# Altium PCB PowerDimmer5.PcbDoc
Units mil, origin at the board's own origin, x right, y up, seen from the top; angles counter-clockwise.
Board outline 6000 x 4000 mil, 2 copper layers (Top Layer, Bottom Layer); 35 components, 26 nets, 100 pads, 0 vias.
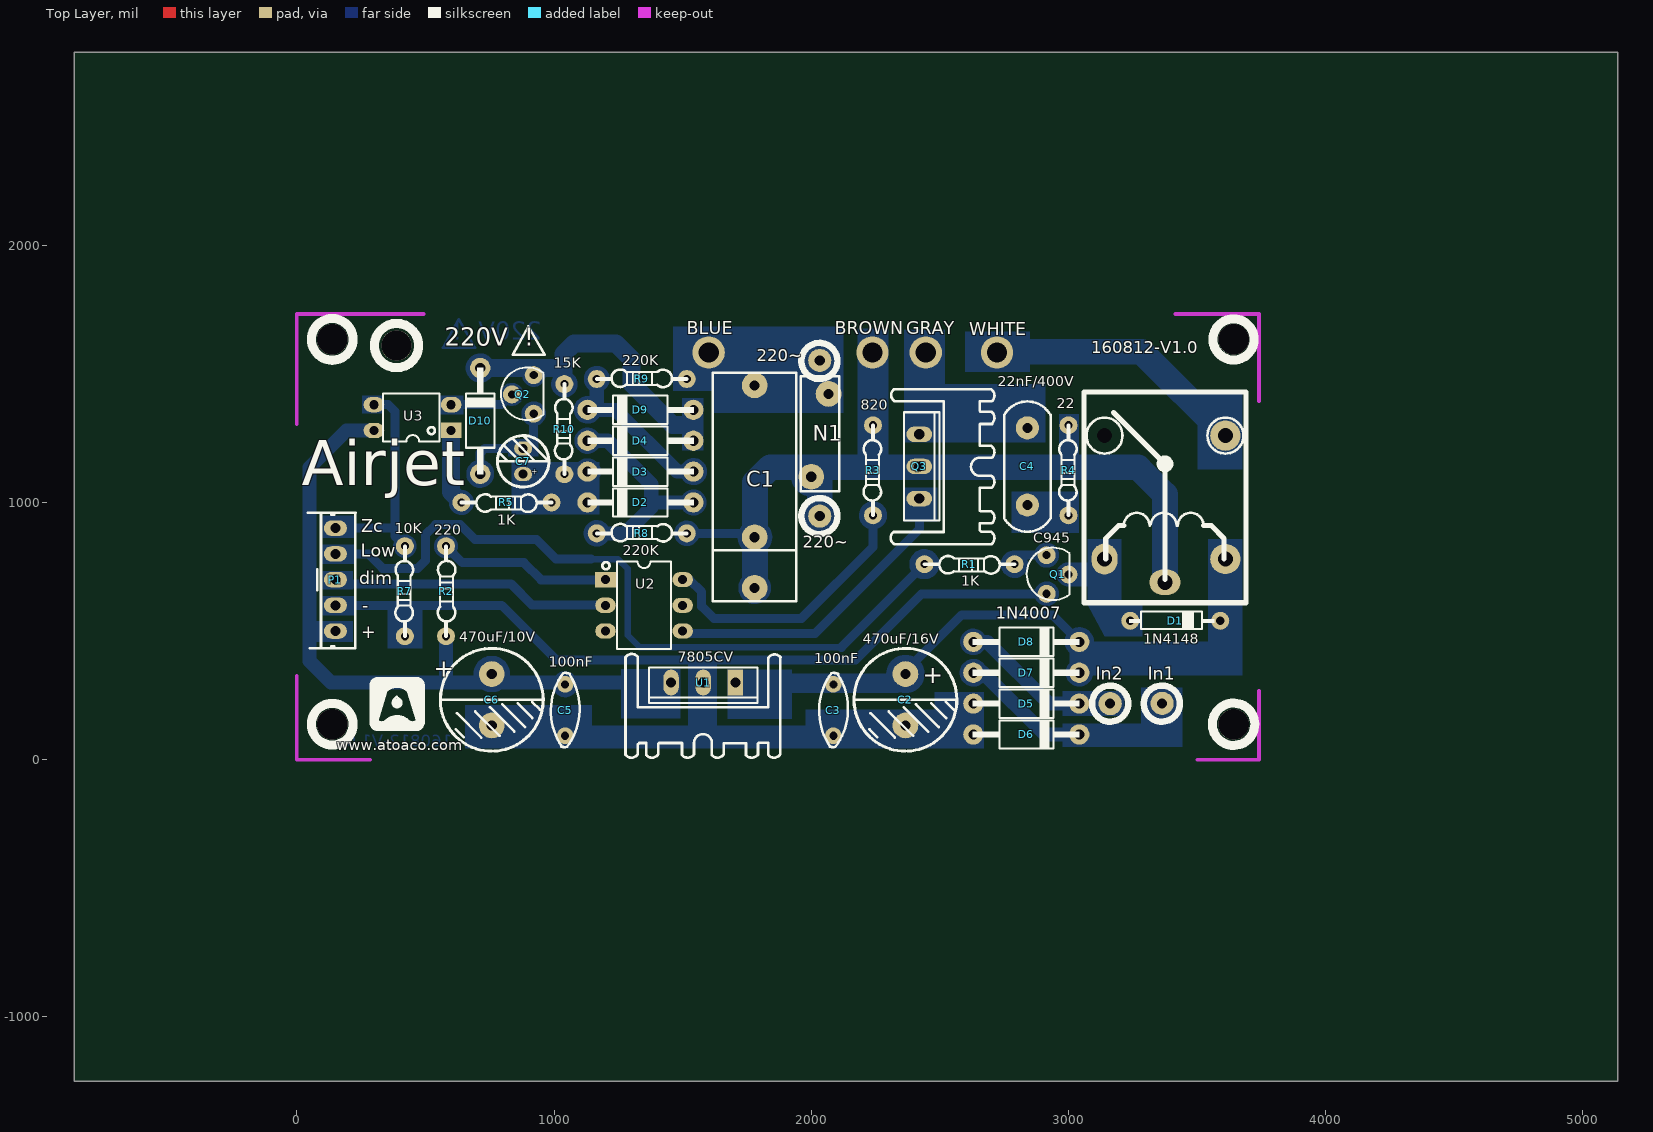
[diagram p0: Top Layer view]
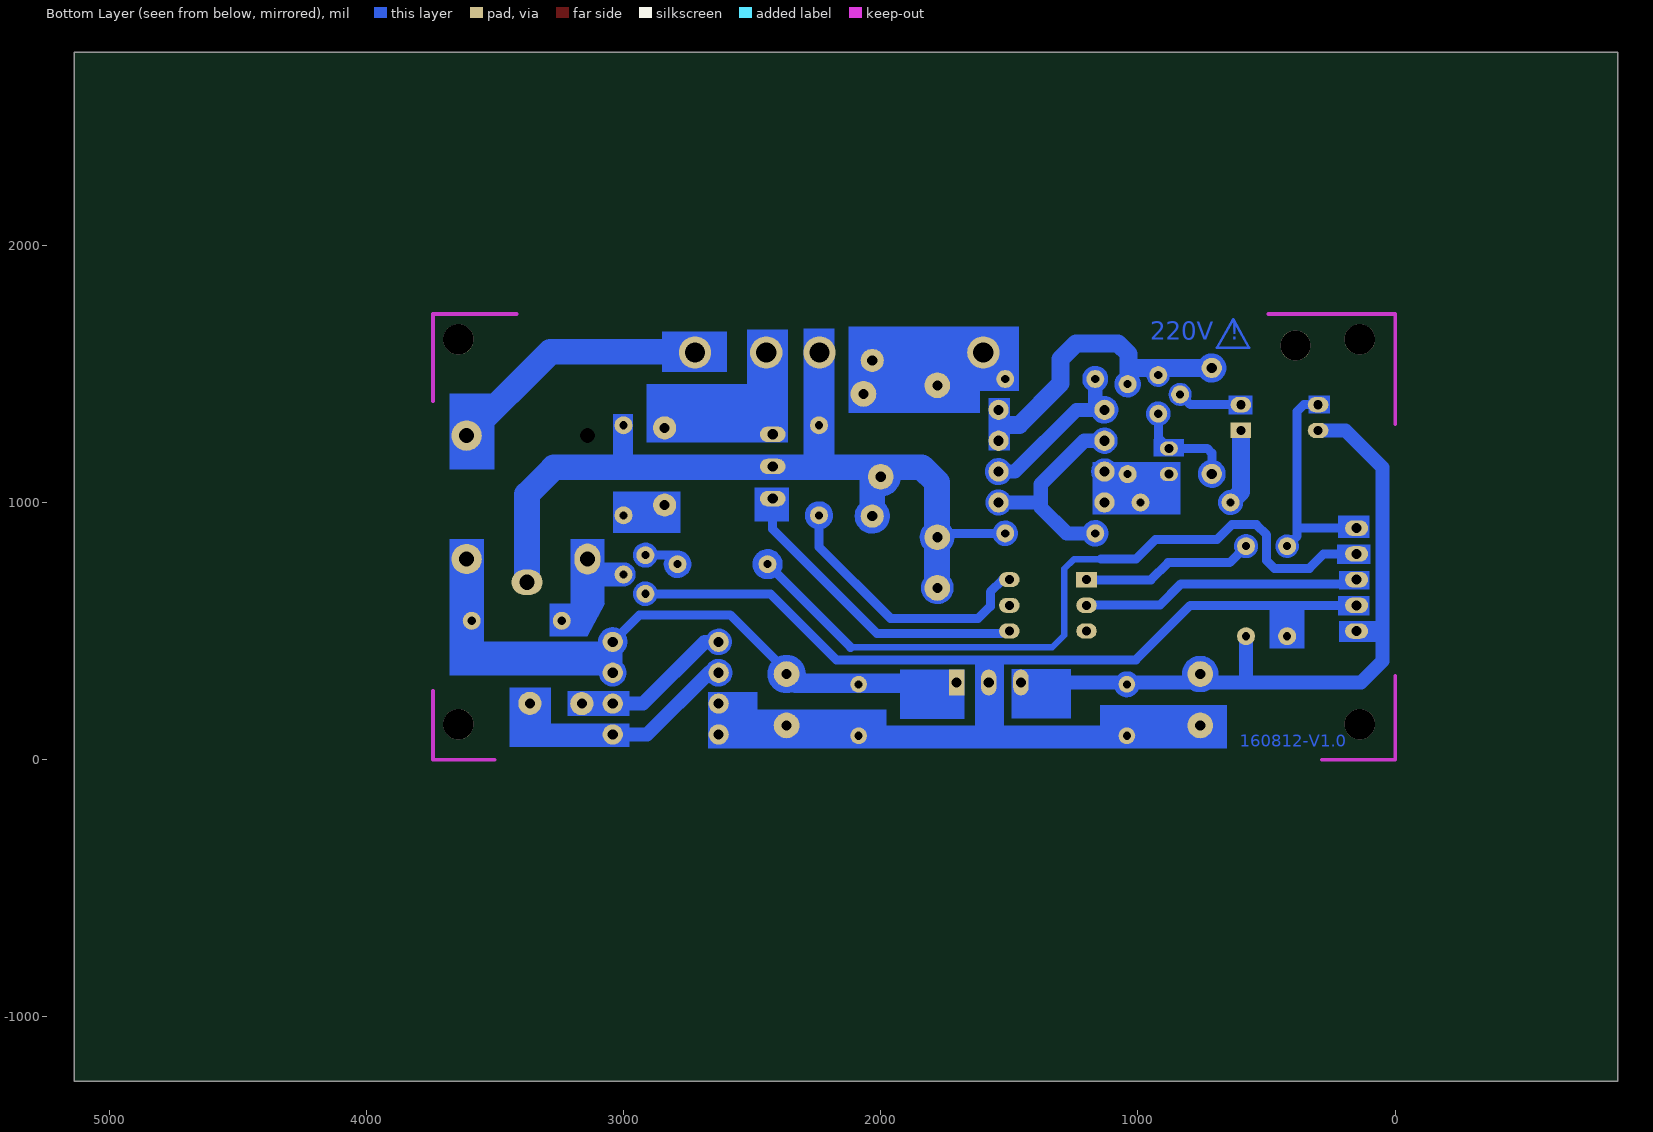
[diagram p1: Bottom Layer view, seen from below]

## Layer stack, top to bottom
Top Layer: signal copper 1.4
Dielectric: dielectric 12.6, FR-4, Dk 4.8
Bottom Layer: signal copper 1.4

## Board outline
-865,-1250 5135,-1250 5135,2750 -865,2750

## Design rules (kind name [scope] priority, off if disabled: settings)
Clearance [All] p1: gap=10
PolygonConnect [All] p1: connectstyle=Relief reliefconductorwidth=10 reliefentries=4 polygonreliefangle="90 Angle"
RoutingVias [All] p1: holewidth=28 width=50 viastyle="Through Hole" minholewidth=28 minwidth=50 maxholewidth=28 maxwidth=50
SolderMaskExpansion [All] p1: expansion=4
TestPointUsage [All] p1: valid=0 allowmultiple=FALSE
Testpoint [All] p1: side=15 testpointundercomponent=TRUE minsize=40 maxsize=100 preferedsize=60 minholesize=0 maxholesize=40 preferedholesize=32 testpointgrid=1 style=1023 order=0-112345678
Width [All] p1: maxlimit=200 minlimit=10 preferedwidth=10 toplayer_maxwidth=10 bottomlayer_prefwidth=35 minimp=50.000000 maximp=50.000000 favimp=50.000000
19 further rules are at their usual default settings.

## Components (designator, comment, footprint, x,y, rotation, side; value= is the part's Value field where it differs from the comment)
C1 "220nF/300V" Cap15-20 1780,1160 r270 top
C2 "470uF/16V" RB.2/.4 2366,333 r270 top
C3 "100nF" RAD0.2 2086,93 r90 top
C4 "22nF/400V" Cap10 2840,1140 r270 top
C5 "100nF" RAD0.2 1043,93 r90 top
C6 "470uF/10V" RB.2/.4 758,333 r270 top (schematic designator C2)
C7 "10uF/50V" RB.1/.2 880,1160 r90 top
D1 "1N4148" DIODE0.35 3240,540 r0 top (schematic designator D8)
D2 "1N4007" DIODE0.4 1336,1000 r180 top
D3 "1N4007" DIODE0.4 1336,1120 r180 top
D4 "1N4007" DIODE0.4 1336,1240 r180 top
D5 "1N4007" DIODE0.4 2836,218 r0 top (schematic designator D1)
D6 "1N4007" DIODE0.4 2836,98 r0 top (schematic designator D2)
D7 "1N4007" DIODE0.4 2836,338 r0 top (schematic designator D3)
D8 "1N4007" DIODE0.4 2836,458 r0 top (schematic designator D4)
D9 "1N4007" DIODE0.4 1336,1360 r180 top
D10 "1N4007" DIODE0.4 713,1317 r90 top
N1 "10D471K" VARISTOR-10MIL 2000,1100 r90 top
P1 "xH5" CON5 150,500 r0 top
Q1 "C945" TO92BS1 2940,720 r270 top
Q2 "7805CV" TO92BS2 896,1420 r270 top
Q3 "Triac" TO-220HS28#1 2420,1140 r270 top
R1 "1K" RES0.35 2440,760 r0 top (schematic designator R9)
R2 "220" RES0.35 580,480 r90 top
R3 "820" RES0.35 2240,1300 r270 top
R4 "22" RES0.35 3000,1300 r270 top
R5 "1K" RES0.35 640,1000 r0 top
R7 "10K" RES0.35 420,830 r270 top
R8 "220K" RES0.35 1516,880 r180 top
R9 "220K" RES0.35 1516,1480 r180 top
R10 "15K" RES0.35 1040,1460 r270 top
U1 "7805CV" TO-220HS28#2 1580,300 r180 top (schematic designator Q2)
U2 "MOC3021" DIP6 1200,700 r270 top
U3 "PC817" DIP4-OPTO 600,1280 r90 top
WHITE "Relay 12V/10A" RELAY2 3140,780 r90 top (schematic designator K4)

## Footprints (in the part's own frame and the unit in brackets; to place one, negate y for a bottom-side part, rotate by r counter-clockwise, add the part's x,y. Pads: shape width x height; smd on the part's side, far side on the other; paste and mask are expansions set on the pad)
Cap10 [mil]
  round 90 hole 39.37: 1(-150,0) 2(150,0)
  silkscreen extent -253,-91 254,91
Cap15-20 [mm]
  round 2.54 hole 1: 1(7.5,0) 1(12.5,0) 2(-7.5,0)
  silkscreen extent -8.76,-4.14 13.82,4.11
CON5 [mil] "100mil between pins"
  oval 90x60 hole 39.37: 1(0,0) 2(0,100) 3(0,200) 4(0,300) 5(0,400)
  silkscreen extent -108,-67 79,461
DIODE0.4 [mm] "Diode, Axial; Body 5.2 x 2.7 mm (LxDia. max), Lead Dia. 0.86 mm (max)"
  round 2 hole 1: 1(-5.23,0) 2(5.23,0)
  silkscreen extent -5.3,-1.4 5.25,1.4
DIODE0.35 [mil] "Diode 1N4148"
  round 70 hole 31.5: 1(0,0) 2(350,0)
  silkscreen extent -4,-31 327,35
DIP4-OPTO [mil] "DIP; 4 Leads; Row Spacing 7.62 mm; Pitch 2.54 mm"
  rect 60x80 hole 35.43: 1(0,0)
  oval 60x80 hole 35.43: 2(100,0)
  oval 59.05x80 hole 35.43: 3(100,300) 4(0,300)
  silkscreen extent -43,46 143,265
DIP6 [mm] "DIP; 6 Leads; Row Spacing 7.62 mm; Pitch 2.54 mm"
  rect 1.524x2.032 hole 0.9: 1(0,0)
  oval 1.524x2.032 hole 0.9: 2(2.54,0)
  oval 1.5x2.032 hole 0.9: 3(5.08,0) 4(5.08,7.62) 5(2.54,7.62) 6(0,7.62)
  silkscreen extent -1.78,-0.3 6.86,6.46
RAD0.2 [mil]
  round 65 hole 31.5: 1(0,0) 2(200,0)
  silkscreen extent -44,-57 244,55
RB.1/.2 [mil]
  oval 55x70 hole 35.43: 1(-50,0) 2(50,0)
  silkscreen extent -100,-100 100,100
RB.2/.4 [mm]
  round 2.54 hole 1: 1(0,0) 2(5.08,0)
  silkscreen extent -2.54,-5.08 7.62,5.08
RELAY2 [mm]
  oval 3.048x2.54 hole 1.5: 1(0,0)
  round 3 hole 1.5: 2(0,-11.938) 4(12.192,-11.938)
  oval 2.54x3.048 hole 1.5: 3(-2.286,-5.969)
  round 1.3 hole 1.5: 5(12.192,0)
  silkscreen extent -4.32,-13.97 16.51,2.03
RES0.35 [mil] "Diode, Axial; Body 5.2 x 2.7 mm (LxDia. max), Lead Dia. 0.86 mm (max)"
  round 70 hole 31.5: 1(0,0)
  round 70 hole 31.5 paste+0: 2(350,0)
  silkscreen extent 0,-37 350,32
TO92BS1 [mil] "NPN-2N3904"
  round 70 hole 31.5: 1(-75,-25) 2(0,60) 3(75,-25)
  silkscreen extent -105,-102 100,63
TO92BS2 [mil] "NPN-CC5551,C945 Base Side"
  round 70 hole 31.5: 1(-75,25) 2(0,-60) 3(75,25)
  silkscreen extent -105,-102 100,63
TO-220HS28#1 [mil] "MOSFET-IRF4905- Z46n"
  oval 60x100 hole 39.37: 1(-125,0) 2(0,0) 3(125,0)
  silkscreen extent -300,-111 302,292
TO-220HS28#2 [mil] "MOSFET-IRF4905- Z46n"
  rect 60x100 hole 39.37: 1(-125,0)
  oval 60x100 hole 39.37: 2(0,0) 3(125,0)
  silkscreen extent -300,-111 302,292
VARISTOR-10MIL [mil]
  round 100 hole 39.37: 1(0,0) 2(322,-67)
  silkscreen extent -56,-109 390,41

## Part data
C1: library part CAP, "Capacitor"
C2 C6: library part "Cap Pol1", "Polarized Capacitor (SMD)"
C4: library part Cap, "Capacitor"
C7: library part "Cap Pol", "Polarized Capacitor"
D1 D5 D6 D7 D8: library part Diode, "1 Amp General Purpose Rectifier"
D2 D3 D4 D9 D10: library part Diode
N1: library part "Res Varistor", "Varistor (Voltage-Sensitive Resistor)"
P1: library part "Header 5", "Header, 5-Pin"
Q1 Q2 U1: library part BC337, "NPN General Purpose Amplifier"
Q3: "Silicon Bidirectional Triode Thyristor"
R1 R2 R3 R4 R5 R7 R8 R9 R10: library part Resistor, "Resistor"
U2: library part "Opto TRIAC_1", "Opto-Triac"
U3: library part Optoisolator1, "4-Pin Phototransistor Optocoupler"
WHITE: library part Relay-SPDT, "Single-Pole Dual-Throw Relay"

## Free pads (board coordinates)
  round 118.11 hole 118.11: 6(3641.73,1633.86) 7(137.8,137.8) 7(137.8,1633.86) 7(387.8,1610) 8(3641.73,137.8)
  round 125.98 hole 78.74: 13(1601,1583) 13(2238,1583) 13(2445,1583) 13(2722,1583)
  round 90 hole 39.37: 14(2033,947) 14(2033,1552) 14(3162,218) 14(3364,219)

## Nets (pads, with @x,y where several pads share a name; then routed paths per layer and width w, separated by ;. In a path a pad name is that pad's centre, name@x,y a point inside that pad or via, vN(x,y) a via of type N, cw(c..) or ccw(c..) an arc to the next point about the centre after c; other vN are vias at no path point)
220V: C1.1 N1.1 pad.13@2238,1583 pad.14@2033,947 Q3.2 R3.1 R4.1 R8.1 WHITE.3 | length 4456.2
  Bottom Layer w35: R8.1 C1.1@1763,880 ; C1.1@1764,900 C1.1@1769,905 ; 3000,1167 R4.1 ; R8.1@1548.02,880 ccw(c1516,880) R8.1@1548.02,880 ; C1.1@1825.83,667.87 ccw(c1780,667.87) C1.1@1825.83,667.87 ; 1831,865 ccw(c1781,865) 1831,865 ; 2060.13,1100 ccw(c2000,1100) 2060.13,1100 ; 2084,947 ccw(c2033,947) 2084,947
  Bottom Layer w100: C1.1@1781,667.87 1781,1078 1840,1137 3270,1137 ; pad.14@2033,947 N1.1@2033,1110 ; 3276,1130 3375,1031 WHITE.3
+5V: C5.2 C6.1 P1.1 R2.1 U1.3 U3.4 | length 3558.6
  Bottom Layer w35: 66,502 68,500 ; P1.1@148,502 P1.1 ; C6.1@774,307 C5.2@1029,307 ; 811.34,333 ccw(c758,333) 811.34,333 ; 1076,293 ccw(c1043,293) 1076,293
  Bottom Layer w55: 66,502 P1.1@148,502 ; U3.4 193,1280 49,1136 49,384 133,300 U1.3 ; 580,310 R2.1
+VREL: C2.1 C3.2 D1.2 D7.2 D8.2 U1.1 WHITE.2 | length 2387
  Bottom Layer w35: C2.1 2366,344 2585,563 2936.91,563 D8.2 ; 2423.08,333 ccw(c2366,333) 2423.08,333 ; D7.2@3077.91,338 ccw(c3041.91,338) D7.2@3077.91,338 ; 3081.55,458 ccw(c3041.91,458) 3081.55,458
  Bottom Layer w75: U1.1@1718,297 2330,297 ; D7.2 D8.2
DIMOUT: P1.3 U2.2 | length 1101
  Bottom Layer w35: P1.3 P1.3@167,683 ; P1.3@157,683 833,683 915,601 U2.2@1200,601
GND: C2.2 C3.1 C5.1 C6.2 D5.1 D6.1 P1.2 Q1.3 R7.2 U1.2 | length 5903.3
  Bottom Layer w35: P1.2@140,600 420,600 ; R7.2@420,490 420,600 ; C6.2@774,107 C5.1@1029,107 ; C5.1 1411,93 ; 1423,105 1411,93 ; 1577,104 1580,107 1580,366 ; 1694,93 C3.1 ; D5.1 2630.09,100.09 2623,93 C3.1 ; Q1.3 2429,645 2172,388 1008,388 796,600 420,600 ; 1411,93 C3.1 ; Q1.3@2945.07,645 ccw(c2915,645) Q1.3@2945.07,645
IN1: D6.2 D7.1 pad.14@3364,219 | length 737.7
  Bottom Layer w35: D7.1@2666.14,338 ccw(c2630.09,338) D7.1@2666.14,338
  Bottom Layer w55: D7.1 2668,338 2908,98 D6.2
IN2: D5.2 D8.1 pad.14@3162,218 | length 724.9
  Bottom Layer w35: D8.1@2664.11,458 ccw(c2630.09,458) D8.1@2664.11,458
  Bottom Layer w55: D8.1 2684,458 2924,218 D5.2
MOTOR1: pad.13@2722,1583 WHITE.4 | length 970
  Bottom Layer w100: pad.13@2775,1586 3284,1586 WHITE.4
MOTOR2: C4.1 pad.13@2445,1583 Q3.1
NetC4_2: C4.2 R4.2
NetC7_1: C7.1 D2.2 D3.2 R5.2 R10.2 | length 213.7
  Bottom Layer w35: D3.2@1164.11,1120 ccw(c1130.09,1120) D3.2@1164.11,1120
NetC7_2: C7.2 D10.1 Q2.3 | length 828.2
  Bottom Layer w35: D10.1 713,1192.09 730.91,1210 C7.2 921,1251 Q2.3 ; D10.1@749.91,1111.09 ccw(c713,1111.09) D10.1@749.91,1111.09 ; Q2.3@951.07,1345 ccw(c921,1345) Q2.3@951.07,1345
NetD1_1: D1.1 Q1.2 WHITE.1 | length 542.2
  Bottom Layer w35: Q1.2 3133,720 3140,713 3140,640 D1.1 ; Q1.2@3029.43,720 ccw(c3000,720) Q1.2@3029.43,720
NetD2_1: D2.1 D4.2 R8.2 | length 1604.2
  Bottom Layer w35: D4.2@1163.65,1240 ccw(c1130.09,1240) D4.2@1163.65,1240 ; R8.2@1199.84,880 ccw(c1166,880) R8.2@1199.84,880 ; D2.1@1568.91,1000 ccw(c1541.91,1000) D2.1@1568.91,1000 ; D2.1@1574.92,1000 ccw(c1541.91,1000) D2.1@1574.92,1000
  Bottom Layer w55: D4.2 1209,1240 1378,1071 1378,981 1277,880 R8.2 ; 1400,1000 D2.1
NetD3_1: D3.1 D9.2 R9.2 | length 1274.9
  Bottom Layer w35: D9.2@1166.21,1360 ccw(c1130.09,1360) D9.2@1166.21,1360 ; R9.2@1199.06,1480 ccw(c1166,1480) R9.2@1199.06,1480 ; D3.1@1576.92,1120 ccw(c1541.91,1120) D3.1@1576.92,1120
  Bottom Layer w55: D9.2 1239,1360 1479,1120 D3.1 ; D9.2@1166,1371 R9.2
NetD4_1: D4.1 D9.1 D10.2 Q2.1 R10.1 | length 1830.6
  Bottom Layer w35: D10.2@752.14,1522.91 ccw(c713,1522.91) D10.2@752.14,1522.91 ; Q2.1@948.92,1495 ccw(c921,1495) Q2.1@948.92,1495 ; R10.1@1074.23,1460 ccw(c1040,1460) R10.1@1074.23,1460
  Bottom Layer w70: D10.2 1030.91,1522.91 1036,1517.81 ; R10.1@1036,1480 1036,1517.81 ; D4.1 1541.91,1302 1461,1302 1301,1462 1301,1558 1241,1618 1077,1618 1036,1577 1036,1517.81
NetQ1_1: Q1.1 R1.2 | length 547.2
  Bottom Layer w35: 2790,795 Q1.1 ; 2826.06,760 ccw(c2790,760) 2826.06,760 ; Q1.1@2946.14,795 ccw(c2915,795) Q1.1@2946.14,795
NetQ2_2: Q2.2 U3.2 | length 422.2
  Bottom Layer w35: U3.2 796,1380 Q2.2 ; Q2.2@863,1420 ccw(c836,1420) Q2.2@863,1420
NetQ3_3: Q3.3 U2.4 | length 1174.8
  Bottom Layer w35: U2.4@1532,491 2015,491 2420,896 Q3.3
NetR2_2: R2.2 U2.1 | length 1038.9
  Bottom Layer w35: R2.2 644.03,765.97 883.03,765.97 950,699 U2.1@1200,699 ; R2.2@609.02,830 ccw(c580,830) R2.2@609.02,830 ; R2.2@609.02,830 ccw(c580,830) 550.98,830 ccw(c580,830) R2.2@609.02,830
NetR3_2: R3.2 U2.6 | length 1422.7
  Bottom Layer w35: U2.6 1526,700 1574,652 1574,596 1621,549 1962,549 2240,827 R3.2 ; 2202.95,950 ccw(c2240,950) 2277.05,950 ; 2277.05,950 ccw(c2240,950) 2277.05,950
NetR5_1: R5.1 U3.1 | length 476.3
  Bottom Layer w35: R5.1@671.14,1000 ccw(c640,1000) R5.1@671.14,1000
  Bottom Layer w70: U3.1@600,1264 600,1040 R5.1
NetR6_1: 
NULL: C1.2 N1.2 pad.13@1601,1583 pad.14@2033,1552 R9.1
RELAY1: P1.4 R1.1 | length 4085.3
  Bottom Layer w25: 1143,780 1248,780 1286,742 1286,484 1333,437 2117,437
  Bottom Layer w35: P1.4 278,800 334,744 470,744 500,774 500,874 540,914 635,914 692.22,856.78 931.22,856.78 1008,780 1143,780 ; 2117,437 R1.1 ; 2398.95,760 ccw(c2440,760) 2481.05,760 ; 2398.95,760 ccw(c2440,760) 2481.05,760 ; 2398.95,760 ccw(c2440,760) 2481.05,760 ; 2398.95,760 ccw(c2440,760) 2481.05,760 ; 2398.95,760 ccw(c2440,760) 2481.05,760 ; 2398.95,760 ccw(c2440,760) 2481.05,760 ; 2398.95,760 ccw(c2440,760) 2481.05,760 ; 2481.05,760 ccw(c2440,760) 2481.05,760
ZEROC: P1.5 R7.1 U3.3 | length 1048
  Bottom Layer w35: P1.5@140,900 380,900 ; U3.3 355,1380 381,1354 381,869 R7.1 ; R7.1@448.02,830 ccw(c420,830) R7.1@448.02,830
pads on no net: U2.3 U2.5 WHITE.5
copper on no net: | length 378.1
  Bottom Layer w10: 629.63,1712.26 568.41,1601.04 692.43,1601.04 ; 629.68,1711.31 692.9,1601.04

## Keep-outs
Keep-Out Layer:
  lines w15: 0,325 0,0 285,0 ; 0,1304 0,1732.28 493,1732.28 ; 3415,1732.28 3740.16,1732.28 3740.16,1395 ; 3501,0 3740.16,0 3740.16,268

## Other copper
Bottom Layer:
  rectangle net ZEROC: 254,1345 338,1416
  rectangle net NetQ2_2: 554,1341 649,1415
  rectangle net RELAY1: 96,760 226,836
  rectangle net NetD4_1: 1497,1202 1582,1406
  rectangle net NetQ3_3: 2357,926 2491,1059
  rectangle net GND: 1521,128 1634,381
  rectangle net GND: 653,133 1148,213
  rectangle net GND: 653,44 1977,133
  rectangle net GND: 1977,44 2479,196
  rectangle net GND: 2479,44 2672,264
  rectangle net NetD1_1: 2991,674 3088,766
  rectangle net NetD1_1: 3140,479 3288,607
  rectangle net NetD1_1: 3073,607 3206,857
  rectangle net MOTOR1: 3501,1128 3677,1424
  rectangle net MOTOR1: 2598,1507 2851,1665
  rectangle net IN1: 2976,49 3430,141
  rectangle net IN1: 3282,49 3444,280
  rectangle net IN2: 2977,169 3217,267
  rectangle net 220V: 2963,1175 3041,1344
  rectangle net NetC4_2: 2778,881 3041,1043
  rectangle net +VREL: 3018,327 3676,459
  rectangle net +VREL: 3542,327 3676,858
  rectangle net NULL: 1463,1434 2126,1685
  rectangle net NULL: 1614,1348 2126,1434
  rectangle net MOTOR2: 2360,1233 2520,1673
  rectangle net 220V: 2179,1179 2300,1676
  region net NetC7_1: 1177,1157 835,1157 835,954 1177,954
  rectangle net MOTOR2: 2360,1233 2911,1461
  rectangle net +5V: 66,458 219,539
  rectangle net GND: 100,560 223,637
  rectangle net DIMOUT: 99,662 219,734
  rectangle net ZEROC: 100,861 222,949
  rectangle net +5V: 1260,161 1492,352
  rectangle net +VREL: 1675,159 1925,351
  rectangle net NetC7_2: 821,1179 939,1247
  rectangle net GND: 352,432 488,600
  region net NetD1_1: 3073,607 3140,479 3140,607
  text "220V  !" at 952.75,1609.38 h120
  text "160812-V1.0" at 604,34 h80

## Silkscreen, mask and mechanical layers (free items; w line width, h text height)
Top Overlay:
  circle w25: c2031.82,1550 r70.18
  circle w25: c2031.82,947 r70.18
  circle w35: c387.8,1610 r86.02
  circle w35: c137.8,1633.86 r81.03
  circle w35: c137.8,137.8 r81.07
  circle w35: c3641.73,137.8 r82.36
  circle w35: c3641.73,1633.86 r79.97
  circle w25: c3362.82,218 r70.18
  circle w25: c3161.82,218 r70.18
  region: 307.4,316.44 467.4,316.44 482.4,311.44 487.4,296.44 487.4,146.44 492.4,141.44 487.4,126.44 472.4,121.44 317.4,121.44 312.4,116.44 297.4,126.44 287.4,141.44 287.4,166.44 302.4,161.44 320.85,176.65 325.72,193.09 347.4,266.44 367.4,281.44 407.4,286.44 427.4,266.44 432.4,266.44 432.4,258.83 442.27,248.96 442.27,224.01 450.62,215.66 450.62,192.5 460.28,182.84 460.28,164.92 467.4,157.81 467.4,151.44 462.4,151.44 452.4,141.44 437.4,141.44 412.4,166.44 362.4,166.44 342.4,146.44 317.4,146.44 312.4,151.44 320.86,176.67 302.4,161.44 287.4,166.44 287.4,291.44
  region: 393.71,239.62 402.4,230.93 402.4,216.44 392.4,206.44 382.4,206.44 377.4,211.44 377.4,230.88 376.92,231.36
  lines w10: 287.4,286.44 287.4,146.44 ccw(c314.9,143.94) 312.4,116.44 462.4,116.44 ccw(c464.9,143.94) 492.4,141.44 492.4,286.44 ccw(c464.9,288.94) 467.4,316.44 317.4,316.44 ccw(c314.9,288.94) 287.4,291.44 ; 312.4,151.44 ccw(c329.9,168.94) 347.4,151.44 cw(c389.9,108.94) 432.4,151.44 ccw(c449.9,168.94) 467.4,151.44 433.07,263.98 ; 313.4,151.44 347.4,266.44 cw(c389.9,223.94) 432.4,266.44 ; 900.47,1684.64 839.25,1573.42 963.26,1573.42 ; 900.52,1683.69 963.74,1573.42 ; 376.92,231.36 ccw(c390,221.24) 402.9,231.61 388.27,244.37 376.92,231.36
  text "BLUE" at 1516,1653 h50
  text "BROWN" at 2092,1653 h50
  text "GRAY" at 2370,1653 h50
  text "220V  !" at 575.94,1585.69 h120
  text "160812-V1.0" at 3089,1564 h80
  text "220~" at 1788,1534 h80
  text "Airjet" at 20,1009 h300
  text "Zc" at 250,885 h50
  text "220~" at 1966,808 h80
  text "Low" at 249,788 h50
  text "dim" at 243,683 h50
  text "-" at 254,575 h50
  text "1N4007" at 2718,533 h80
  text "+" at 251,472 h50
  text "+" at 533,323 h70
  text "In2" at 3106,311 h50
  text "In1" at 3309,311 h50
  text "+" at 2433,298 h70
  text "www.atoaco.com" at 155,23 h70

## Text inside footprints (layer, text, board x,y; h text height)
C7: Top Overlay "+" at 940,1106 h39.37 r90